# EAGLE board DRV8824 Drive Rev F -BWF (EAGLE 7.5.0)
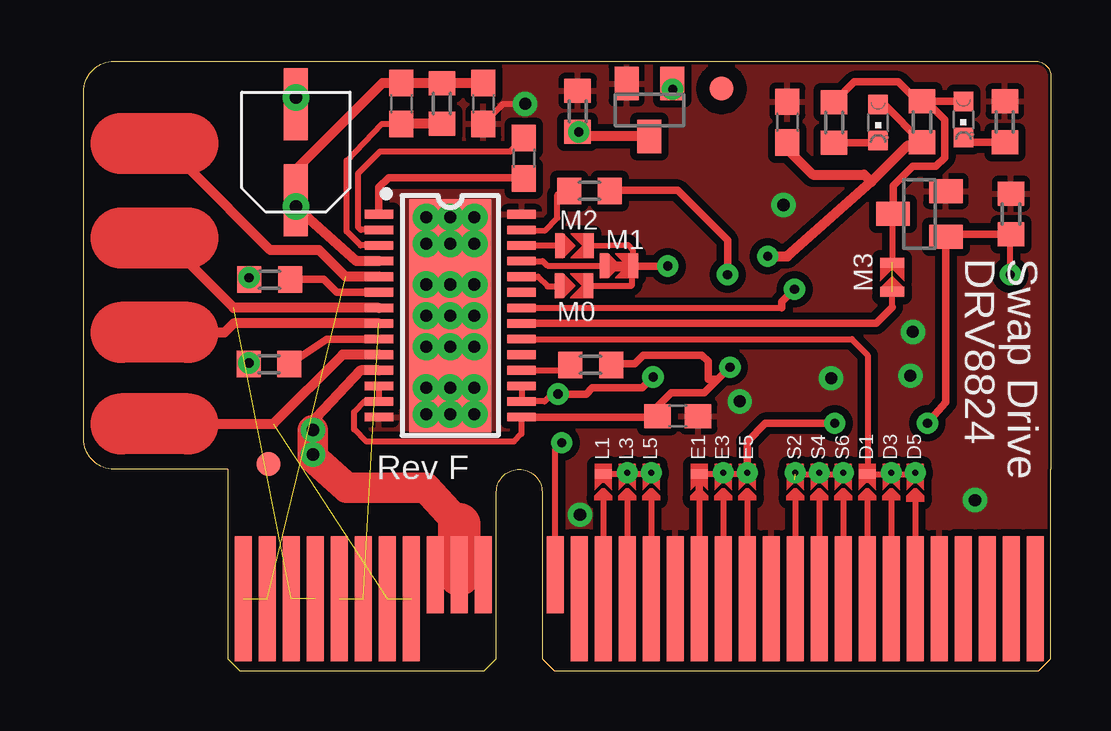
[diagram p0: board, top side]
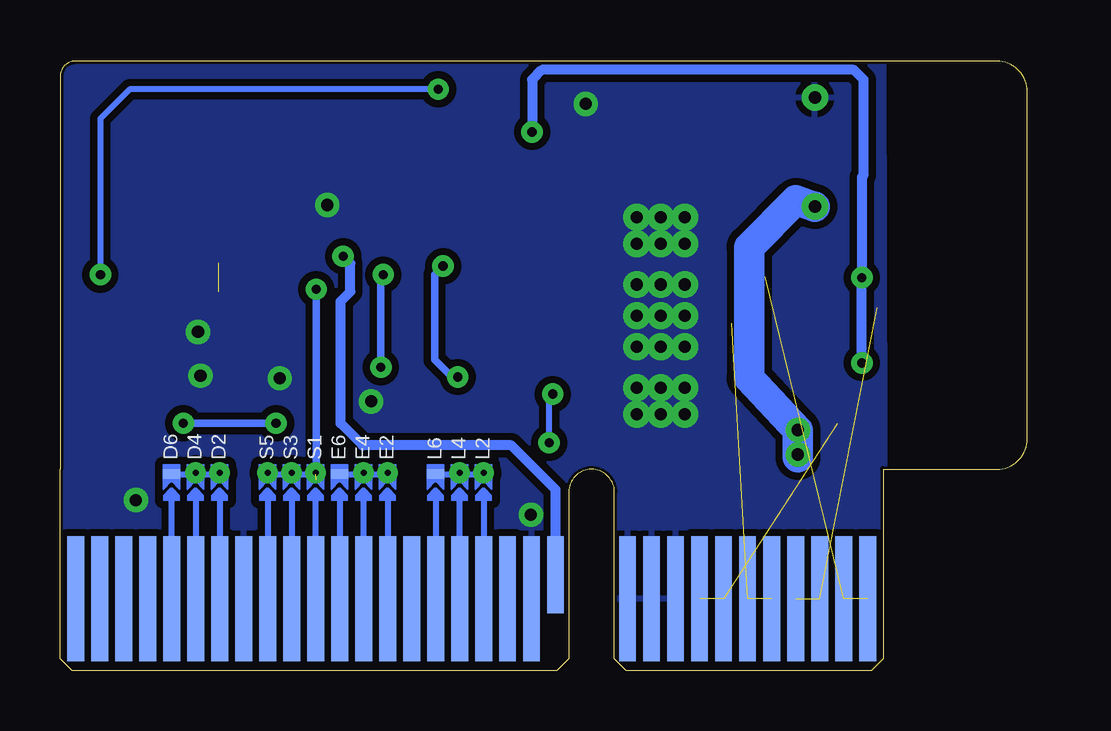
[diagram p1: board, bottom side, seen from below]

Size 40.3 x 25.4 mm. Coordinates in mm from the lower left corner, seen from the top.
Outline: 40.3,8.4 40.3,24.77 arc90 39.66,25.4 6.63,25.4 1.27,25.4 arc90 0,24.13 0,9.67 arc90 1.27,8.4 6,8.4
Copper layers (1*16): Top 0.035mm / dielectric 1.5mm / Bottom 0.035mm
Design rules "SparkFun *": minimum track width 8mil, minimum drill 20mil, track to track 0.305mm, track to pad 0.305mm, pad to pad 8mil, via to via 8mil, smd to smd 8mil, copper to edge 5mil, drill to drill 8mil, minimum pad ring 12mil, minimum via ring 10mil, stop-mask expansion 4mil, vias tented up to drill 0.7mm, thermal gap 10mil

## Footprints (pad centres in the part's own frame; a part is rotated, then mirrored left to right if it is on the bottom)
SOT23 = smd 1 x 1.4: 1 -0.95,-1.1; 2 0.95,-1.1; 3 0,1.1
C0603 = smd 1.1 x 1: 1 -0.85,0; 2 0.85,0
HTSSOP-28 = smd 0.36 x 1.19: 1 -4.225,-2.97; 2 -3.575,-2.97; 3 -2.925,-2.97; 4 -2.275,-2.97; 5 -1.625,-2.97; 6 -0.975,-2.97; 7 -0.325,-2.97; 8 0.325,-2.97; 9 0.975,-2.97; 10 1.625,-2.97; 11 2.275,-2.97; 12 2.925,-2.97; 13 3.575,-2.97; 14 4.225,-2.97; 15 4.225,2.97; 16 3.575,2.97; 17 2.925,2.97; 18 2.275,2.97; 19 1.625,2.97; 20 0.975,2.97; 21 0.325,2.97; 22 -0.325,2.97; 23 -0.975,2.97; 24 -1.625,2.97; 25 -2.275,2.97; 26 -2.925,2.97; 27 -3.575,2.97; 28 -4.225,2.97 | drill 0.508: GND@10 -4.1,1; GND@11 -4.1,0; GND@12 -4.1,-1; GND@13 -3,-1; GND@14 -3,0; GND@15 -3,1; GND@16 -1.3,1; GND@17 -1.3,0; GND@18 -1.3,-1; GND@19 0,-1; GND@20 0,0; GND@21 0,1; GND@22 1.3,1; GND@23 1.3,0; GND@24 1.3,-1; GND@25 3,-1; GND@26 3,0; GND@27 3,1; GND@28 4.1,1; GND@29 4.1,0; GND@30 4.1,-1 | smd 9.7 x 3.4: GND@PAD 0,0
CHIPLED_0603 = smd 0.8 x 0.8: A 0,-0.75; C 0,0.75
SELECTIVE_CONNECT = smd 0.4 x 1: P$1 0,0; P$2 1.2,0
R0603 = smd 1 x 1.1: 1 -0.85,0; 2 0.85,0
PCIE_64_SMART_BOARD = smd 0.7 x 5.2 bottom: GND@1 8.65,3; GND@2 9.65,3; GND@3 10.65,3; P$1 0.65,3; P$2 1.65,3; P$3 2.65,3; P$4 3.65,3; P$5 4.65,3; P$6 5.65,3; P$7 6.65,3; P$8 7.65,3; P$13 14.65,3; P$14 15.65,3; P$15 16.65,3; P$16 17.65,3; P$17 18.65,3; P$18 19.65,3; P$19 20.65,3; P$20 21.65,3; P$21 22.65,3; P$22 23.65,3; P$23 24.65,3; P$24 25.65,3; P$25 26.65,3; P$26 27.65,3; P$27 28.65,3; P$28 29.65,3; P$29 30.65,3; P$30 31.65,3; P$31 32.65,3; P$32 33.65,3 | smd 0.7 x 3.2 bottom: P$12 13.65,4 | smd 0.7 x 0.4 bottom: P$15@1 16.65,8.2; P$16@1 17.65,8.2; P$17@1 18.65,8.2; P$19@1 20.65,8.2; P$20@1 21.65,8.2; P$21@1 22.65,8.2; P$22@1 23.65,8.2; P$23@1 24.65,8.2; P$24@1 25.65,8.2; P$26@1 27.65,8.2; P$27@1 28.65,8.2; P$28@1 29.65,8.2 | smd 0.7 x 5.2: P$33 0.65,3; P$34 1.65,3; P$35 2.65,3; P$36 3.65,3; P$37 4.65,3; P$38 5.65,3; P$39 6.65,3; P$40 7.65,3; P$45 14.65,3; P$46 15.65,3; P$47 16.65,3; P$48 17.65,3; P$49 18.65,3; P$50 19.65,3; P$51 20.65,3; P$52 21.65,3; P$53 22.65,3; P$54 23.65,3; P$55 24.65,3; P$56 25.65,3; P$57 26.65,3; P$58 27.65,3; P$59 28.65,3; P$60 29.65,3; P$61 30.65,3; P$62 31.65,3; P$63 32.65,3; P$64 33.65,3 | drill 0.254 pad 0.305: P$41 21.65,8.25; P$42 17.65,8.25; P$43 16.65,8.25; P$65 20.65,8.25; P$66 23.65,8.25; P$67 24.65,8.25; P$68 27.65,8.25; P$69 28.65,8.25; P$70 25.65,8.25 | smd 0.7 x 3.2: P$44 13.65,4; VCC@1 8.65,4; VCC@2 9.65,4; VCC@3 10.65,4 | smd 0.7 x 0.4: P$46@1 15.65,8.2; P$47@1 16.65,8.2; P$48@1 17.65,8.2; P$50@1 19.65,8.2; P$51@1 20.65,8.2; P$52@1 21.65,8.2; P$54@1 23.65,8.2; P$55@1 24.65,8.2; P$56@1 25.65,8.2; P$57@1 26.65,8.2; P$58@1 27.65,8.2; P$59@1 28.65,8.2
EEEFK0J220R = smd 1 x 3: GND@1 0,-2; P$1 0,2 | drill 0.508: GND@2 0,-2.27; P$3 0,2.27
FIDUCIAL_1MM = smd 1 x 1: 1 0,0

## Placement (x,y rotation side)
2N7002P  [SOT23]  34.83,19.04 90 top
2N7002P1  [SOT23]  23.58,23.37 180 top
C1  4.7uf  [C0603]  24.75,10.6 0 top
C2  .01uf  [C0603]  18.35,21.36 270 top
C3  .1uf  [C0603]  13.24,23.63 270 top
C4  .1uf  [C0603]  16.66,23.63 270 top
C5  .1uf  [C0603]  29.32,22.86 270 top
DRV8824  DRV8824  [HTSSOP-28]  15.27,14.8 270 top
GRN  [CHIPLED_0603]  33.1,22.85 180 top
M0  SELECTIVE_CONNECT  [SELECTIVE_CONNECT]  19.83,16.03 0 top
M1  SELECTIVE_CONNECT  [SELECTIVE_CONNECT]  21.7,16.88 0 top
M2  SELECTIVE_CONNECT  [SELECTIVE_CONNECT]  19.84,17.72 0 top
M3  SELECTIVE_CONNECT  [SELECTIVE_CONNECT]  33.69,15.8 90 top
R1  10k  [R0603]  21.12,12.75 0 top
R2  10k  [R0603]  21.07,20 0 top
R3  1m  [R0603]  14.93,23.63 270 top
R4  [R0603]  7.75,16.3 0 top
R5  [R0603]  7.72,12.78 0 top
R6  10k  [R0603]  38.64,19.04 270 top
R7  460  [R0603]  34.93,22.87 270 top
R8  460  [R0603]  38.38,22.87 90 top
R9  460  [R0603]  31.27,22.85 90 top
R10  [R0603]  20.58,23.32 270 top
RED  [CHIPLED_0603]  36.66,22.97 180 top
U$1  [PCIE_64_SMART_BOARD]  6,0 0 top
U$2  EEEFK0J220R  [EEEFK0J220R]  8.84,21.62 180 top
U$4  FIDUCIAL  [FIDUCIAL_1MM]  7.7,8.61 0 top
U$5  FIDUCIAL  [FIDUCIAL_1MM]  26.57,24.26 0 top

## Library data of the parts
2N7002P 2N7002P1 C1-C5 GRN R1-R10 RED U$4 U$5 = adafruit
DRV8824 M0 M1-M3 U$1 U$2 = PocketNC

## Nets
3.3V: C1.1 DRV8824.12 DRV8824.13 DRV8824.15 R1.2 R2.2
3V: C5.2 GRN.A R7.2 U$1.P$12
5V: DRV8824.16 DRV8824.17 M0.P$2 M1.P$2 M2.P$2 U$1.P$44
A1: DRV8824.5 U$1.P$33 U$1.P$34
A2: DRV8824.7 U$1.P$35 U$1.P$36
B1: DRV8824.10 U$1.P$39 U$1.P$40
B2: DRV8824.8 U$1.P$37 U$1.P$38
CHANGE_A: 2N7002P1.3 R4.1 R5.1 R10.2
DIR: DRV8824.20 U$1.P$57@1
ENBL-IN: 2N7002P1.1 2N7002P.1 R6.2 U$1.P$50@1
ENBL-OUT: 2N7002P.3 DRV8824.21 M3.P$1 M3.P$2 R7.1 R9.2 RED.A
GND: 2N7002P1.2 2N7002P.2 C1.2 C4.2 C5.1 DRV8824.14 DRV8824.28 DRV8824.GND@10 DRV8824.GND@11 DRV8824.GND@12 DRV8824.GND@13 DRV8824.GND@14 DRV8824.GND@15 DRV8824.GND@16 DRV8824.GND@17 DRV8824.GND@18 DRV8824.GND@19 DRV8824.GND@20 DRV8824.GND@21 DRV8824.GND@22 DRV8824.GND@23 DRV8824.GND@24 DRV8824.GND@25 DRV8824.GND@26 DRV8824.GND@27 DRV8824.GND@28 DRV8824.GND@29 DRV8824.GND@30 DRV8824.GND@PAD R6.1 R8.2 R10.1 U$1.GND@1 U$1.GND@2 U$1.GND@3 U$1.P$13 U$1.P$25 U$1.P$49 U$1.P$53 U$1.P$60 U$2.GND@2
N$1: C2.2 DRV8824.1
N$2: C2.1 DRV8824.2
N$3: R8.1 RED.C
N$4: DRV8824.9 R5.2
N$5: DRV8824.18 R1.1
N$6: DRV8824.6 R4.2
N$7: GRN.C R9.1
N$16: DRV8824.27 R2.1
N$17: DRV8824.26 M2.P$1
N$18: DRV8824.25 M1.P$1
N$19: DRV8824.24 M0.P$1
STEP: DRV8824.22 U$1.P$22@1
VCC: C3.1 C4.1 DRV8824.4 DRV8824.11 R3.1 U$1.VCC@1 U$1.VCC@2 U$1.VCC@3 U$2.P$3
VCP: C3.2 DRV8824.3 R3.2

## Tracks (layer width: path | path; a pad name or v marks a point on that pad's centre or on a via)
3.3V  (via drill 0.38)
  Top 0.254: DRV8824.12 DRV8824.13 11.71,11.22 11.27,10.78 11.27,10.06 11.78,9.55 17.93,9.55 18.24,9.87 DRV8824.15
  Top 0.305: DRV8824.15 23.87,10.57 C1.1 23.9,10.99 24.49,11.58 25.86,11.58 26.42,12.14 | R1.2 22.02,12.8 22.97,12.8 23.32,13.16 25.76,13.16 26.02,12.9 26.02,12.14 26.42,12.14 | 26.42,12.14 26.57,12.29 v26.93,12.65 | v26.83,16.51 26.83,17.93 24.75,20.02 21.94,20.02 R2.2
  Bottom 0.305: v26.93,12.65 26.93,16.41 v26.83,16.51
3V  (via drill 0.38)
  Top 0.305: GRN.A 33.36,23.6 R7.2 34.8,21.89 34.35,21.89
  Top 0.406: v28.5,17.27 29.32,17.27 32.82,20.37 | 32.82,20.37 34.35,21.89 | C5.2 29.32,21.74 30.38,20.68 32.52,20.68 32.82,20.37
  Bottom 0.406: U$1.P$12 19.65,7.55 21.49,9.4 27.69,9.4 28.61,10.31 28.61,15.39 28.2,15.8 28.2,16.97 v28.5,17.27
5V  (via drill 0.38)
  Top 0.254: DRV8824.17 DRV8824.16 19.21,11.23 19.51,11.53 v19.77,11.53 | M2.P$2 22.68,17.75 22.88,17.55 22.88,16.88 M1.P$2 22.85,16.78 22.85,16.08 22.81,16.04 M0.P$2 | U$1.P$44 19.65,9.23 v19.92,9.5
  Top 0.305: v19.77,11.53 20.94,11.53 21.19,11.79 23.27,11.79 v23.73,12.24 | v24.34,16.87 22.92,16.87 M1.P$2
  Bottom 0.254: v19.92,9.5 19.92,11.38 v19.77,11.53
  Bottom 0.305: v23.73,12.24 23.98,12.24 24.69,12.95 24.69,16.51 v24.34,16.87
A1  (2 unrouted)
  Top 0.406: DRV8824.5 10.91,16.42 9.81,17.53 7.78,17.53 4.35,20.95 4.35,21.97
  Top 2.54: 4.35,21.97 1.55,21.97
A2  (2 unrouted)
  Top 0.406: DRV8824.7 6.25,15.12 4.35,17.02 4.35,18.03
  Top 2.54: 4.35,18.03 1.55,18.03
B1  (2 unrouted)
  Top 0.406: DRV8824.10 10.79,13.17 7.91,10.29 4.35,10.29
  Top 2.54: 4.35,10.29 1.55,10.29
B2  (2 unrouted)
  Top 0.406: DRV8824.8 6.25,14.47 5.87,14.1 4.35,14.1
  Top 2.54: 4.35,14.1 1.55,14.1
CHANGE_A  (via drill 0.38)  (1 unrouted)
  Top 0.406: R4.1 6.81,16.3 | R10.2 20.63,22.42 v20.63,22.45 20.82,22.27 2N7002P1.3 | R5.1 6.89,12.79 v6.89,12.83
  Bottom 0.406: v20.63,22.45 20.63,24.64 20.22,25.04 7.22,25.04 6.81,24.64 6.81,20.65 6.89,20.57 v6.89,16.38 6.89,16.31 R4.1 6.9,13.35 v6.89,12.83
DIR
  Top 0.254: DRV8824.20 32.01,13.82 32.67,13.16 32.67,8.22 U$1.P$57@1
ENBL-IN  (via drill 0.38)
  Top 0.254: 2N7002P1.1 24.53,24.32 v24.54,24.23 | v38.61,16.51 38.61,18.16 R6.2
  Top 0.305: R6.2 36.03,18.19 2N7002P.1 35.93,11.18 v35.16,10.31 | 27.7,8.2 27.64,8.26 27.64,9.55 28.4,10.31 v31.3,10.31
  Bottom 0.254: v24.54,24.23 37.39,24.23 38.61,23.01 v38.61,16.51
  Bottom 0.305: v35.16,10.31 v31.3,10.31
ENBL-OUT  (1 unrouted)
  Top 0.254: 33.69,18.99 M3.P$2 | 33.69,15.14 M3.P$1
  Top 0.305: RED.A R7.1 | R7.1 34.75,23.72 33.94,24.54 32.11,24.54 R9.2 | R7.1 35.11,23.72 35.87,22.96 35.87,21.39 35.52,21.03 34.55,21.03 33.74,20.22 2N7002P.3 33.69,18.99 | DRV8824.21 33.02,14.47 33.69,15.14
GND  (via drill 0.51)
  Top 0.254: C4.2 17.49,23.62 v18.39,23.62
  other vias: 31.15,12.19 27.34,11.23 34.45,12.29 34.55,14.12 20.68,6.5 29.16,19.41 37.14,7.11
  pour Bottom: 5.93,25.4 40.5,25.49 40.45,2.06 5.88,1.98
  pour Top: 5.93,25.41 40.52,25.48 40.44,2.07 5.93,1.95
N$1
  Top 0.305: DRV8824.1 12.3,20.15 12.71,20.55 18.31,20.55 C2.2
N$2
  Top 0.254: DRV8824.2 11.55,18.37 11.44,18.49 11.44,20.73 12.35,21.64 17.78,21.64 C2.1
N$3
  Top 0.305: R8.1 36.86,22.02 RED.C
N$4
  Top 0.305: DRV8824.9 10.13,13.82 R5.2
N$5
  Top 0.254: DRV8824.18 20.3,12.52 R1.1
N$6
  Top 0.305: DRV8824.6 10.55,15.77 10,16.32 8.62,16.32 R4.2
N$7
  Top 0.305: R9.1 33,22 GRN.C
N$8
  Top 0.406: 21.85,16.87 22.87,16.87
N$9
  Top 0.305: 25.66,7.21 25.66,8.28
N$16
  Top 0.254: DRV8824.27 19.22,18.35 19.74,18.87 19.74,19.84 R2.1
N$17
  Top 0.254: DRV8824.26 20.17,17.72 M2.P$1
N$18
  Top 0.254: DRV8824.25 19.13,17.07 19.32,16.88 M1.P$1
N$19
  Top 0.254: DRV8824.24 18.93,16.42 19.34,16.02 20.18,16.02 M0.P$1
STEP  (via drill 0.38)  (1 unrouted)
  Top 0.254: DRV8824.22 29.1,15.12
  Top 0.305: 29.1,15.12 29.1,15.38 v29.62,15.9
  Bottom 0.305: v29.62,15.9 29.62,7.96
VCC  (via drill 0.51)
  Top 0.305: U$1.VCC@1 U$1.VCC@2 U$1.VCC@3
  Top 0.406: C4.1 R3.1 C3.1 12.45,24.48 8.85,20.88 U$2.P$3 11.37,17.07 DRV8824.4 | DRV8824.11 11.54,12.52 9.68,10.54 9.68,10.16 v9.56,10.03
  Top 1.27: 15.65,6.1 14.26,7.62 10.95,7.62 9.56,8.89 v9.56,9.02 v9.56,10.03
  Top 1.778: U$1.VCC@2 15.65,6.1
  Bottom 1.27: U$2.P$3 9.64,19.6 11.59,17.65 11.59,12.19 v9.56,10.03 v9.56,9.02 9.56,8.89
VCP
  Top 0.254: DRV8824.3 11.54,17.72 10.95,18.31 10.95,21.26 12.43,22.79 C3.2
  Top 0.406: R3.2 C3.2

## Text on the board
tNames: M2 | M1 | DRV8824 | Swap Drive | M3 | M0 | Rev F